# Altium PCB Breakout.PcbDoc
Units mil, origin at the board's own origin, x right, y up, seen from the top; angles counter-clockwise.
Board outline 2900 x 1175 mil, 4 copper layers (Sig/5V, GND 1, GND 2, Sig/3V3), stack 62.445 mil thick; 5 components, 39 nets, 138 pads, 72 vias.
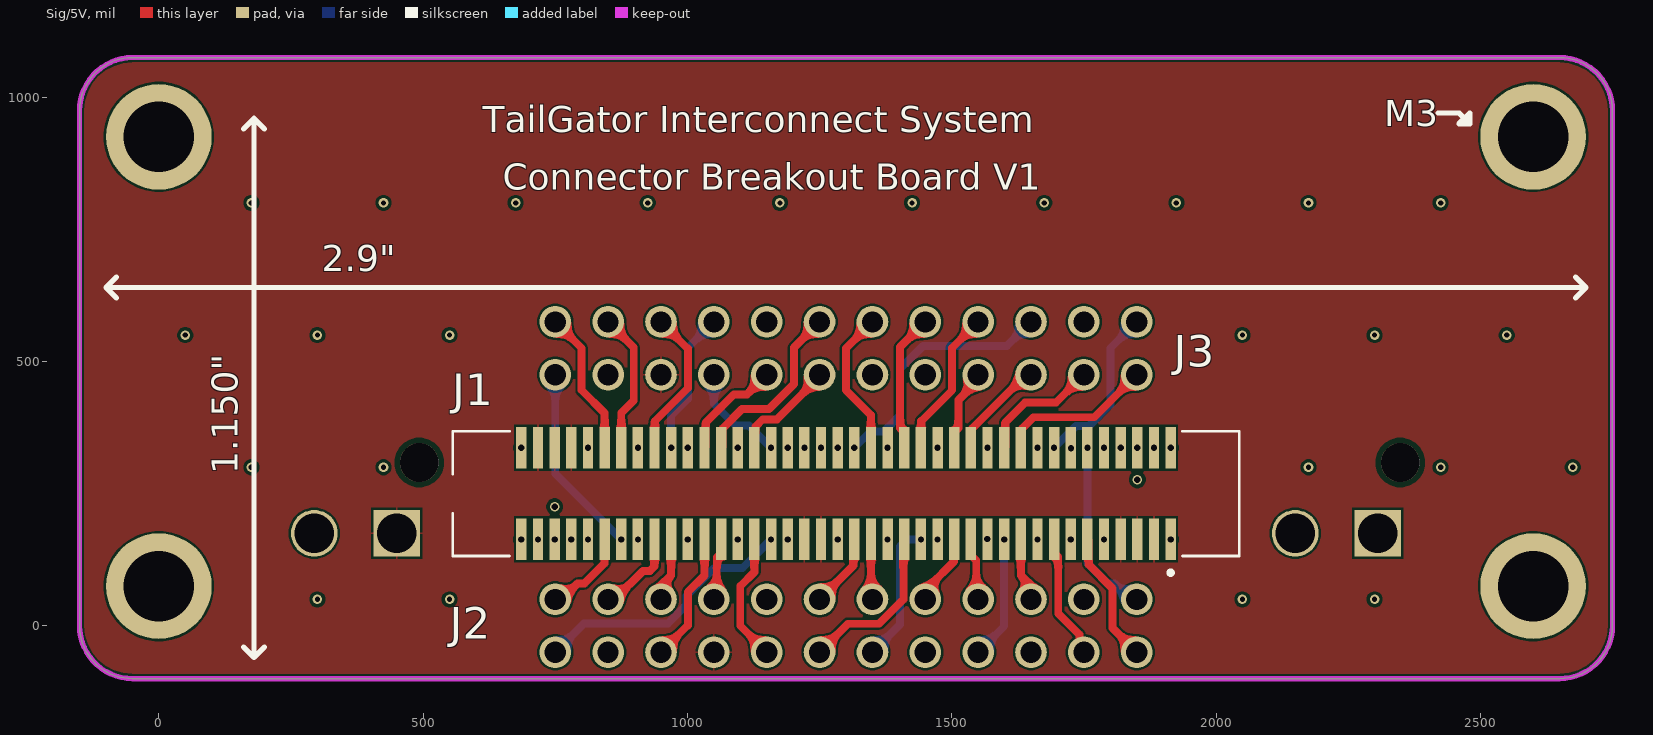
[diagram p0: Sig/5V view]
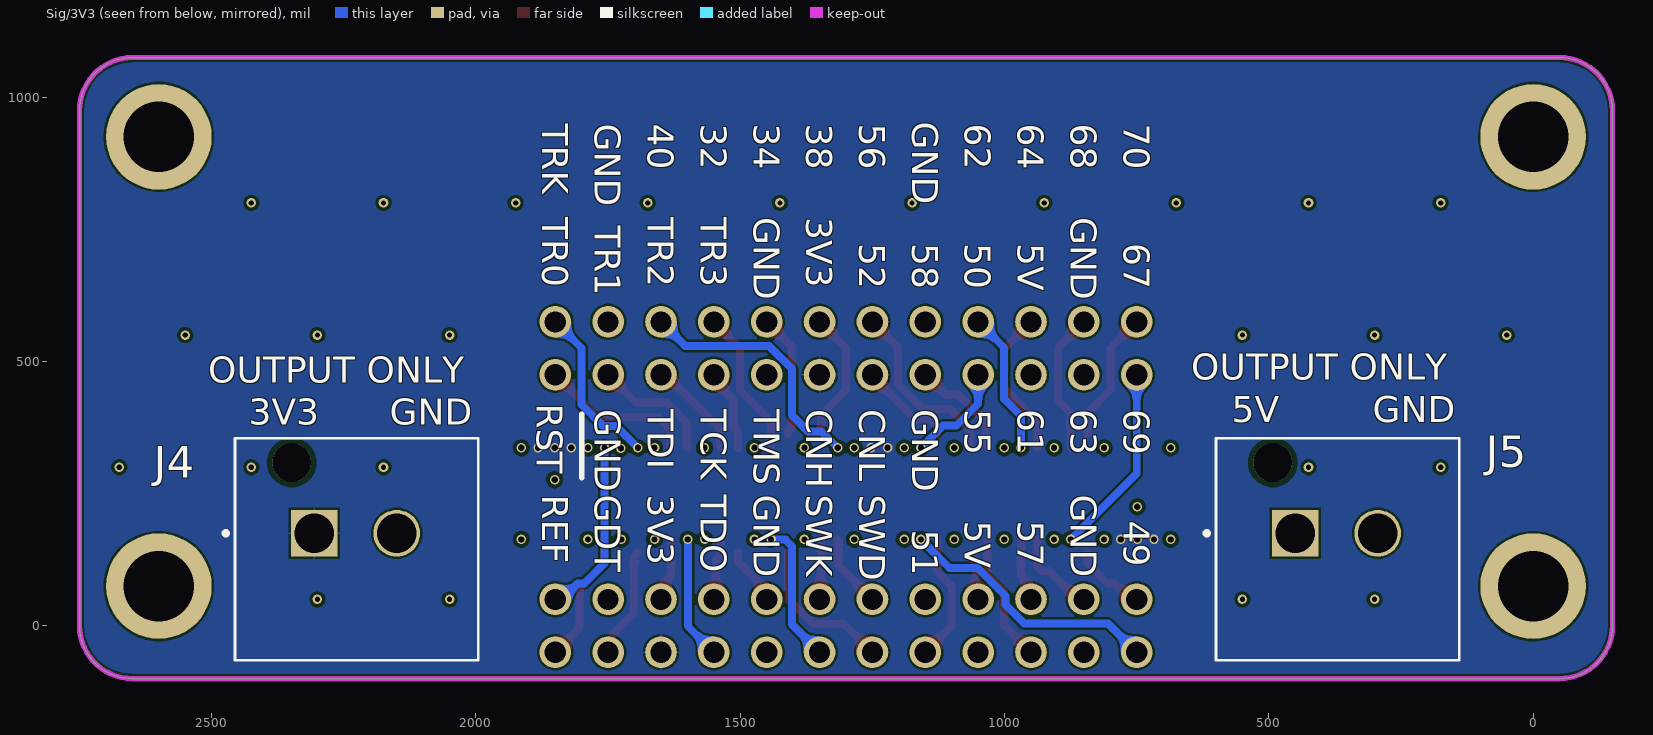
[diagram p1: Sig/3V3 view, seen from below]
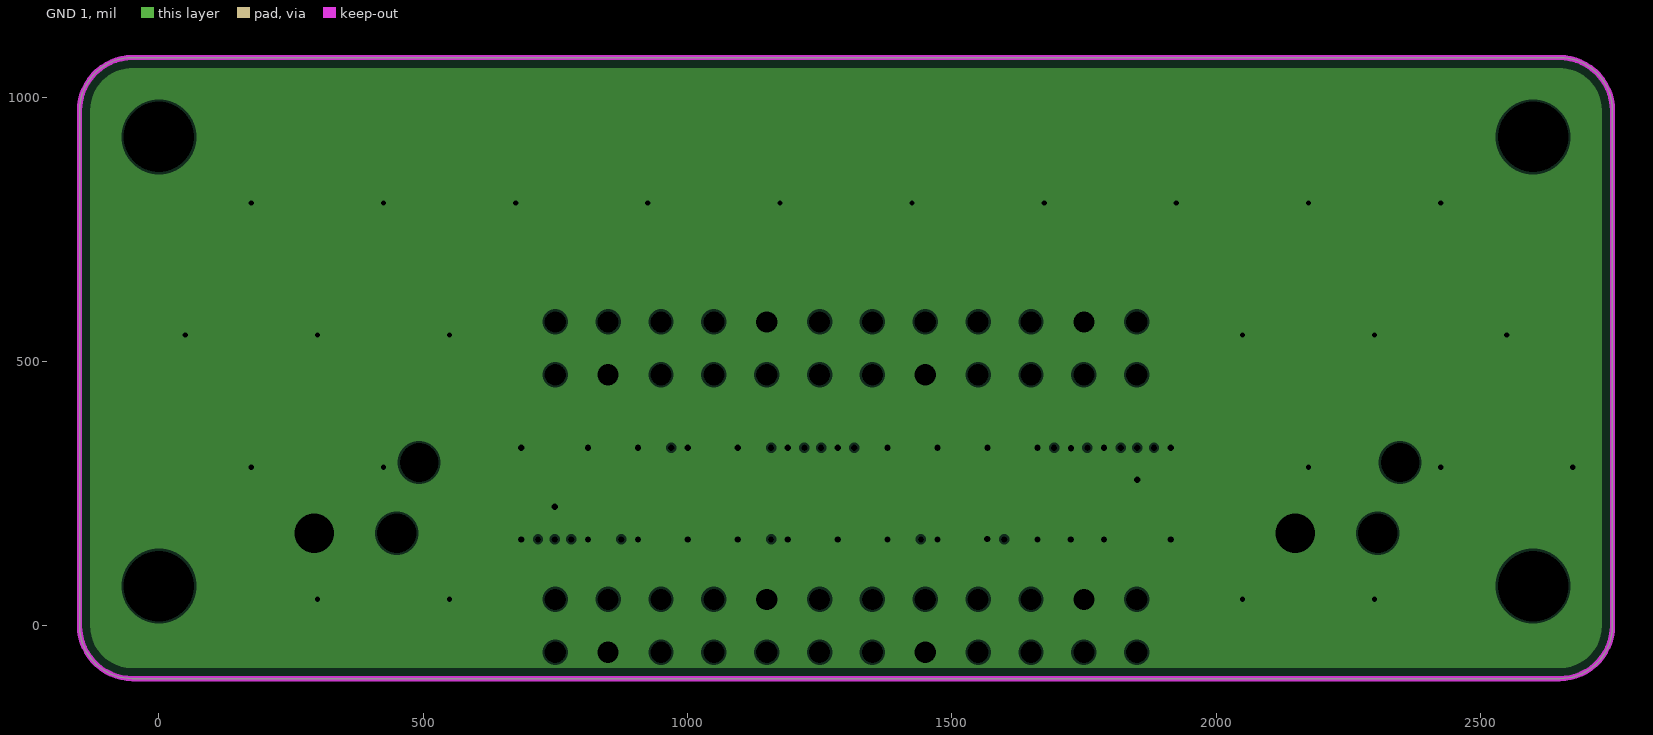
[diagram p2: GND 1, clearances drawn from the general rule]
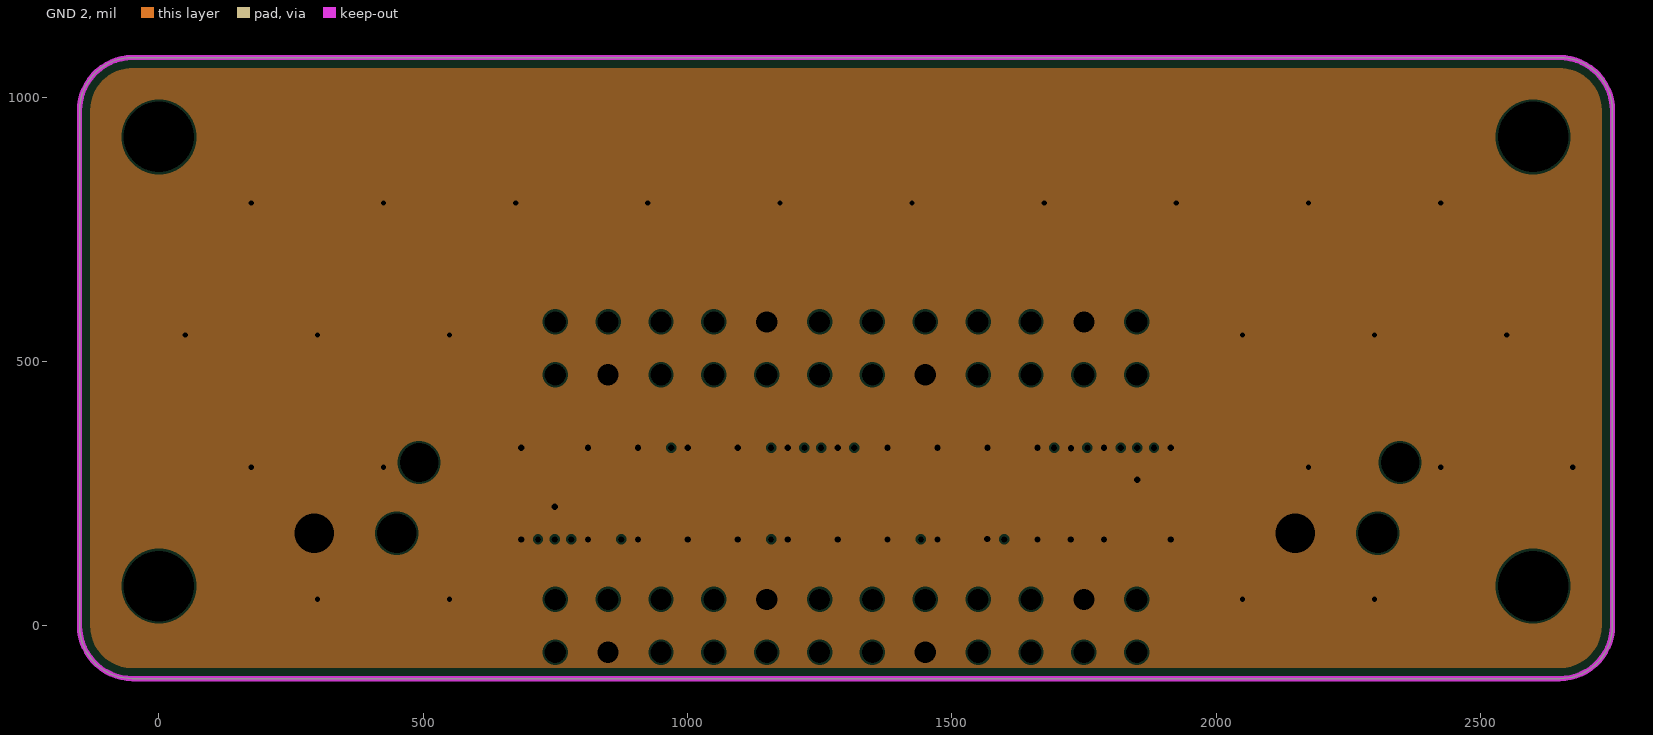
[diagram p3: GND 2, clearances drawn from the general rule]
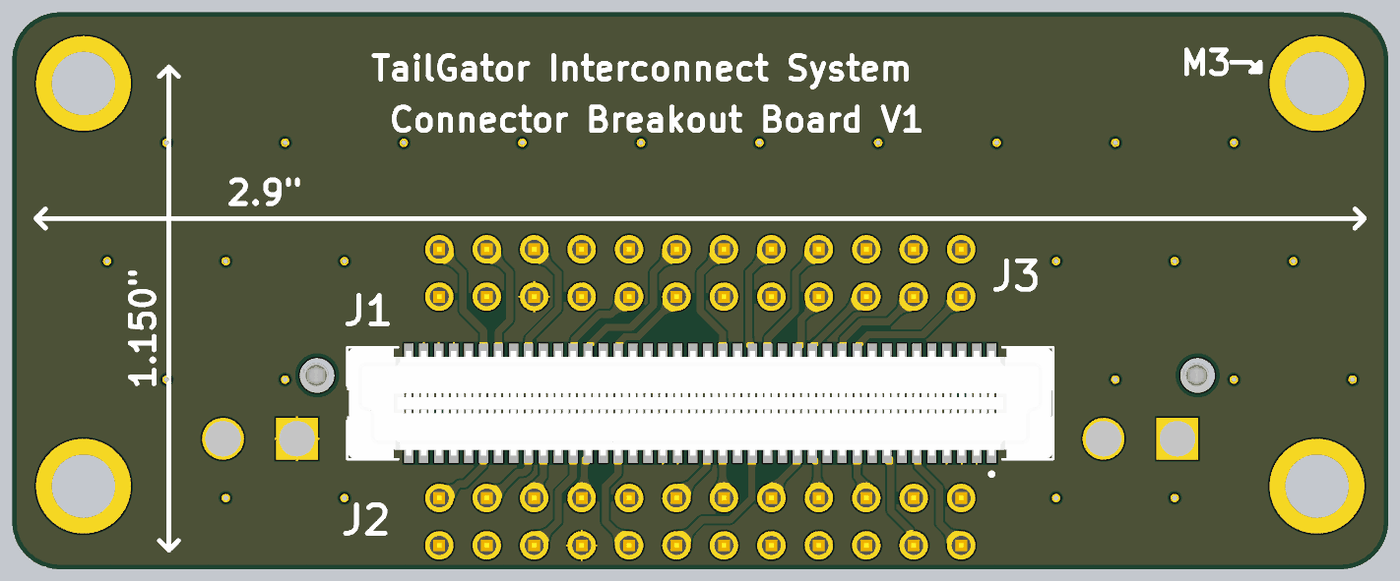
[diagram p4: 3D render of the assembled board from above, using the file's embedded part models]

## Layer stack, top to bottom
Top Mask: solder mask 0.591, Solder Resist, Dk 3.8
Sig/5V: signal copper 1.378
Dielectric 1: prepreg 8.28, 7628, Dk 4.6
GND 1: plane copper 0.6, net GND
Core: core 41.929, FR-4, Dk 4.5
GND 2: plane copper 0.6, net GND
Dielectric 2: prepreg 8.28, 7628, Dk 4.6
Sig/3V3: signal copper 1.378
Bottom Mask: solder mask 0.591, Solder Resist, Dk 3.8

## Board outline
-150,0 -150,975 cw(c-50,975) -50,1075 2650,1075 cw(c2650,975) 2750,975 2750,0 cw(c2650,0) 2650,-100 -50,-100 cw(c-50,0)

## Design rules (kind name [scope] priority, off if disabled: settings)
BoardOutlineClearance [All] p1: gap=7.87 ignorepadtopadclearanceinfootprint=FALSE
Clearance [All] p1: gap=4 ignorepadtopadclearanceinfootprint=FALSE except(5: Arc-Via Track-Via SMDPad-Via THPad-Via Via-Via Via-Fill Via-Poly Via-Region Via-Text; 9.84: Arc-Hole Track-Hole SMDPad-Hole THPad-Hole Via-Hole Fill-Hole Poly-Hole Region-Hole Text-Hole)
ComponentClearance [All] p1: gap=4 collisioncheckmode=3 verticalgap=4 showdistances=TRUE
DiffPairsRouting "Schematic Differential Pairs Routing" [InNetClass('CAN0')] p1: maxlimit=10 minlimit=10 mostfreqgap=10 toplayer_minwidth=15 toplayer_maxwidth=15 toplayer_prefwidth=15 bottomlayer_minwidth=15 bottomlayer_maxwidth=15 bottomlayer_prefwidth=15 maxuncoupledlength=5
DiffPairsRouting [All] p2: maxlimit=4 minlimit=4 mostfreqgap=4 toplayer_minwidth=4 toplayer_maxwidth=71497.94 toplayer_prefwidth=4 bottomlayer_minwidth=4 bottomlayer_maxwidth=71497.94 bottomlayer_prefwidth=4 maxuncoupledlength=500
Height [All] p1: minheight=0 maxheight=71497.94 prefheight=500
HoleSize [All] p1: absolutevalues=TRUE maxlimit=248.03 minlimit=7.87 maxpercent=80.000 minpercent=20.000
HoleToHoleClearance [All] p1: gap=9.84 allowstackedmicrovias=FALSE
MatchedLengths "Schematic Matched Net Lengths" [InNetClass('CAN0')] p1: tolerance=5 checknetsindiffpair=TRUE checkdiffpairvsdiffpair=FALSE checkxsignals=FALSE checkothers=FALSE
MinimumAnnularRing [All] p1: minimumring=3
MinimumSolderMaskSliver [All] p1: minsoldermaskwidth=0
PlaneClearance [All] p1: clearance=4
PlaneConnect PlaneConnectPowerPads [InPadClass('PowerPads')] p1: planeconnectstyle=Direct reliefexpansion=20 reliefentries=4 reliefconductorwidth=10 reliefairgap=10
PlaneConnect [All] p2: pad.planeconnectstyle=Relief pad.reliefexpansion=11.81 pad.reliefentries=4 pad.reliefconductorwidth=4 pad.reliefairgap=4 via.planeconnectstyle=Direct via.reliefexpansion=11.81 via.reliefentries=4 via.reliefconductorwidth=5 via.reliefairgap=5
PolygonConnect PolygonConnectPowerPads [All vs (InPadClass('PowerPads'))] p1: connectstyle=Direct reliefconductorwidth=10 reliefentries=4 polygonreliefangle="90 Angle" airgapwidth=10
PolygonConnect [All] p2: thpad.connectstyle=Relief thpad.reliefconductorwidth=4 thpad.reliefentries=4 thpad.polygonreliefangle="90 Angle" thpad.airgapwidth=4 smdpad.connectstyle=Relief smdpad.reliefconductorwidth=4 smdpad.reliefentries=4 smdpad.polygonreliefangle="90 Angle" smdpad.airgapwidth=4 via.connectstyle=Direct via.reliefconductorwidth=5 via.reliefentries=4 via.polygonreliefangle="90 Angle" via.airgapwidth=5
RoutingVias [All] p1: holewidth=7.87 width=17.72 viastyle="Through Hole" minholewidth=7.87 minwidth=17.72 maxholewidth=248.03 maxwidth=257.87
SilkToSilkClearance [All] p1: silktosilkclearance=0
SilkToSolderMaskClearance [IsPad] p1: minsilkscreentomaskgap=4 clearancetoexposedcopper=TRUE
SolderMaskExpansion [All] p1: expansion=2.95 istentingtop=FALSE
Width [All] p1: maxlimit=71497.94 minlimit=4 preferedwidth=4
20 further rules are at their usual default settings.

## Classes and differential pairs
differential pair class CAN0_LINES: CAN0
net class CAN0: CAN0_N CAN0_P
differential pair CAN0: +CAN0_P -CAN0_N

## Components (designator, comment, footprint, x,y, rotation, side; value= is the part's Value field where it differs from the comment)
J1 "10144518-081802LF" AMPHENOL_10144518-081802LF 1300,250 r180 top locked
J2 "PREC012DAAN-RC" PREC012DAAN-RC 1850,-50 r180 top
J3 "PREC012DAAN-RC" PREC012DAAN-RC 1850,475 r180 top locked
J4 "1877285-2" TE_1877285-2 2305.91,175 r180 bottom
J5 "1877285-2" TE_1877285-2 450,175 r180 bottom

## Footprints (in the part's own frame and the unit in brackets; to place one, negate y for a bottom-side part, rotate by r counter-clockwise, add the part's x,y. Pads: shape width x height; smd on the part's side, far side on the other; paste and mask are expansions set on the pad)
AMPHENOL_10144518-081802LF [mm]
  rect 0.5x2 smd: 1(-15.6,2.2) 2(-15.6,-2.2) 3(-14.8,2.2) 4(-14.8,-2.2) 5(-14,2.2) 6(-14,-2.2) 7(-13.2,2.2) 8(-13.2,-2.2) 9(-12.4,2.2) 10(-12.4,-2.2) 11(-11.6,2.2) 12(-11.6,-2.2) 13(-10.8,2.2) 14(-10.8,-2.2) 15(-10,2.2) 16(-10,-2.2) 17(-9.2,2.2) 18(-9.2,-2.2) 19(-8.4,2.2) 20(-8.4,-2.2) 21(-7.6,2.2) 22(-7.6,-2.2) 23(-6.8,2.2) 24(-6.8,-2.2) 25(-6,2.2) 26(-6,-2.2) 27(-5.2,2.2) 28(-5.2,-2.2) 29(-4.4,2.2) 30(-4.4,-2.2) 31(-3.6,2.2) 32(-3.6,-2.2) 33(-2.8,2.2) 34(-2.8,-2.2) 35(-2,2.2) 36(-2,-2.2) 37(-1.2,2.2) 38(-1.2,-2.2) 39(-0.4,2.2) 40(-0.4,-2.2) 41(0.4,2.2) 42(0.4,-2.2) 43(1.2,2.2) 44(1.2,-2.2) 45(2,2.2) 46(2,-2.2) 47(2.8,2.2) 48(2.8,-2.2) 49(3.6,2.2) 50(3.6,-2.2) 51(4.4,2.2) 52(4.4,-2.2) 53(5.2,2.2) 54(5.2,-2.2) 55(6,2.2) 56(6,-2.2) 57(6.8,2.2) 58(6.8,-2.2) 59(7.6,2.2) 60(7.6,-2.2) 61(8.4,2.2) 62(8.4,-2.2) 63(9.2,2.2) 64(9.2,-2.2) 65(10,2.2) 66(10,-2.2) 67(10.8,2.2) 68(10.8,-2.2) 69(11.6,2.2) 70(11.6,-2.2) 71(12.4,2.2) 72(12.4,-2.2) 73(13.2,2.2) 74(13.2,-2.2) 75(14,2.2) 76(14,-2.2) 77(14.8,2.2) 78(14.8,-2.2) 79(15.6,2.2) 80(15.6,-2.2)
  silkscreen extent -18.9,-3 18.9,3.9, body extent -18.9,-3 18.9,3, height 4.71
PREC012DAAN-RC [mil] "Connector Header Through Hole 24 position 0.100\" (2.54mm)"
  round 60 hole 40: 1(0,-100) 2(100,-100) 3(200,-100) 4(300,-100) 5(400,-100) 6(500,-100) 7(600,-100) 8(700,-100) 9(800,-100) 10(900,-100) 11(1000,-100) 12(1100,-100) 13(0,0) 14(100,0) 15(200,0) 16(300,0) 17(400,0) 18(500,0) 19(600,0) 20(700,0) 21(800,0) 22(900,0) 23(1000,0) 24(1100,0)
  body extent -50,-150 1150,50, height 96
TE_1877285-2 [mm]
  rect 2.24x2.24 hole 1.89: 1(0,0)
  round 2.24 hole 1.89: 2(3.96,0)
  round 1.86 hole 1.86 unplated: ""(-1.08,3.4)
  silkscreen extent -4.36,-6.1 7.87,4.57, body extent -3.55,-5.82 7.62,4.06, height 12.01

## Part data
J1: "CONN PLUG 1 80POS SMD GOLD", Supplier Part Number 1=609-5453-1-ND, Supplier 1=Digikey, System=Connector
J2 J3: "Connector Header Through Hole 24 position 0.100\" (2.54mm)", Supplier Part Number 1=S2012EC-12-ND, Supplier 1=Digikey
J4 J5: Supplier Part Number 1=A99845-ND, Supplier 1=Digi-Key

## Free pads (board coordinates)
  round 200 hole 133.86: M3(0,75) M3(0,925) M3(2600,75) M3(2600,925)

## Via types
v1: diameter 17.81, hole 11.81, Sig/5V to Sig/3V3, tented top, 47 vias
v2: diameter 18, hole 10, Sig/5V to Sig/3V3, 25 vias

## Nets (pads, with @x,y where several pads share a name; then routed paths per layer and width w, separated by ;. In a path a pad name is that pad's centre, name@x,y a point inside that pad or via, vN(x,y) a via of type N, cw(c..) or ccw(c..) an arc to the next point about the centre after c; other vN are vias at no path point)
+3V3: J1.4 J1.6 J1.8 J1.44 J1.46 J1.73 J1.75 J1.77 J2.15 J3.18 J4.1
  other v1: 717.32,163.39 748.82,163.39 780.32,163.39 1221.26,336.61 1252.76,336.61 1819.69,336.61 1851.18,336.61 1882.68,336.61
+5V: J1.3 J1.5 J1.7 J1.43 J1.45 J1.74 J1.76 J1.78 J2.21 J3.22 J5.1
CAN0_N: J1.39 J2.7 | length 140.5
  Sig/5V w15: J2.7@1250,50.07 1314.01,114.09 1314.01,161.65 J1.39
CAN0_P: J1.37 J2.6 | length 114.5
  Sig/5V w15: J1.37 1347.24,52.76 J2.6
GND: J1.1 J1.2 J1.9 J1.10 J1.13 J1.14 J1.17 J1.18 J1.23 J1.24 J1.29 J1.30 J1.35 J1.36 J1.41 J1.42 J1.47 J1.48 J1.53 J1.54 J1.59 J1.60 J1.65 J1.66 J1.71 J1.72 J1.79 J1.80 J2.2 J2.8 J2.17 J2.23 J3.2 J3.8 J3.17 J3.23 J4.2 J5.2
  other v1: 685.83,163.39 811.81,163.39 906.3,163.39 1000.79,163.39 1095.28,163.39 1189.76,163.39 1284.25,163.39 1378.74,163.39 1473.23,163.39 1662.2,163.39 1725.2,163.39 1788.19,163.39 1914.17,163.39 1567.03,164.08 748.82,225.2 1851.18,276.38 1725.89,335.92 685.83,336.61 811.81,336.61 906.3,336.61 1000.79,336.61 1095.28,336.61 1189.76,336.61 1284.25,336.61 1378.74,336.61 1473.23,336.61 1567.72,336.61 1662.2,336.61 1788.19,336.61 1914.17,336.61
  other v2: 300,50 550,50 2050,50 2300,50 175,300 425,300 2175,300 2425,300 2675,300 50,550 300,550 550,550 2050,550 2300,550 2550,550 175,800 425,800 675,800 925,800 1175,800 1425,800 1675,800 1925,800 2175,800 2425,800
GNDDetect: J1.15 J2.14 | length 211.9
  Sig/5V w15: J1.15@1693.7,138.58 1693.7,137.85 1701.57,129.97 1701.57,23.43 1741.39,-16.39 1741.39,-41.39 J2.14
JnRST: J1.12 J2.1 | length 339.9
  Sig/3V3 w15: v1(1756.69,336.61) 1756.69,118.31 1795.07,79.93 1807.9,79.93 1837.82,50 J2.1
JTCK: J1.25 J2.4 | length 119.1
  Sig/5V w15: J1.25 1536.22,133.86 1546.37,123.7 1546.37,53.63 J2.4
JTDI: J1.19 J2.3 | length 121.4
  Sig/5V w15: J1.19 1630.71,95.16 1648.37,77.5 1648.37,51.63 J2.3
JTDO: J1.21 J2.16 | length 233.8
  Sig/3V3 w15: J2.16 1599.21,-0.79 v1(1599.21,163.39)
JTMS: J1.27 J2.5 | length 111.3
  Sig/5V w15: J2.5 1458.61,58.61 1458.61,75.79 1504.2,121.38 1504.2,138.06 J1.27@1504.72,138.58
RSVD_32: J1.32 J3.4 | length 283.2
  Sig/5V w15: J1.32 1442.25,337.13 1442.25,387.13 1500.79,445.67 1500.79,525.79 J3.4
RSVD_34: J1.34 J3.5 | length 235
  Sig/5V w15: J1.34@1410.24,362.99 1410.24,366.14 1402.36,374.02 1402.36,527.36 J3.5
RSVD_38: J1.38 J3.6 | length 252.3
  Sig/5V w15: J1.38@1347.24,362.99 1347.24,398.43 1300,445.67 1300,525 J3.6
RSVD_40: J1.40 J3.3 | length 484.3
  Sig/3V3 w15: v1(1315.75,336.61) 1346.92,367.79 1371.73,367.79 1402.36,398.43 1402.36,486.05 1445.6,529.29 1604.29,529.29 J3.3
RSVD_49: J1.49 J2.24 | length 506.8
  Sig/3V3 w15: J2.24 804.21,4.21 962.9,4.21 997.86,39.17 997.86,56.55 1051.01,109.7 1104.58,109.7 v1(1158.27,163.39)
RSVD_50: J1.50 J3.21 | length 197.8
  Sig/3V3 w15: J3.21 1050,420.08 1091.46,378.62 1116.27,378.62 v1(1158.27,336.61)
RSVD_51: J1.51 J2.20 | length 245.2
  Sig/5V w15: J1.51 1126.77,101.77 1100,75 1100,0 J2.20
RSVD_52: J1.52 J3.19 | length 178.8
  Sig/5V w15: J1.52@1126.77,362.99 1129.11,365.33 1129.11,377.15 1142.52,390.55 1169.39,390.55 1250,471.16 J3.19
RSVD_55: J1.55 J2.9 | length 94.3
  Sig/5V w15: J2.9 1055.53,55.53 1055.53,129.6 1063.78,137.85 J1.55@1063.78,138.58
RSVD_56: J1.56 J3.7 | length 345.3
  Sig/5V w15: J1.56 1066.12,338.96 1066.12,372.94 1103.42,410.24 1154.33,410.24 1201.57,457.48 1201.57,526.57 J3.7
RSVD_57: J1.57 J2.22 | length 247.5
  Sig/5V w15: J2.22 1000.79,0.79 1000.79,63.78 1032.28,95.28 J1.57
RSVD_58: J1.58 J3.20 | length 201.6
  Sig/5V w15: J1.58 1034.63,338.96 1034.63,384.35 1088.15,437.88 1112.88,437.88 J3.20
RSVD_61: J1.61 J2.10 | length 121.4
  Sig/5V w15: J2.10 951.63,51.63 951.63,77.5 969.29,95.16 J1.61
RSVD_62: J1.62 J3.9 | length 271.8
  Sig/3V3 w15: v1(969.29,336.61) 969.29,397.33 1000.79,428.83 1000.79,525.79 J3.9
RSVD_63: J1.63 J2.11 | length 164.4
  Sig/5V w15: J2.11 862.18,50 915.96,103.79 928.79,103.79 937.57,112.57 937.57,163.16 J1.63
RSVD_64: J1.64 J3.10 | length 285.5
  Sig/5V w15: J1.64 938.31,337.13 938.31,387.13 1000.79,449.61 1000.79,524.21 J3.10
RSVD_67: J1.67 J3.24 | length 363.3
  Sig/3V3 w15: J3.24 750,288.19 v1(874.8,163.39)
RSVD_68: J1.68 J3.11 | length 268.2
  Sig/5V w15: J3.11 898.43,526.57 898.43,425.98 874.8,402.36 J1.68
RSVD_69: J1.69 J2.12 | length 141.9
  Sig/5V w15: J2.12 762.18,50 792.1,79.93 804.93,79.93 842.79,117.79 842.79,138.06 J1.69@843.31,138.58
RSVD_70: J1.70 J3.12 | length 250.7
  Sig/5V w15: J3.12 800,525 800,445.67 843.31,402.36 J1.70@843.31,362.99
SWDCLK: J1.31 J2.18 | length 266.8
  Sig/3V3 w15: J2.18 1402.36,2.36 1402.36,150.39 1414.82,162.85 1441.19,162.85 v1(1441.73,163.39)
SWDIO: J1.33 J2.19 | length 289.3
  Sig/5V w15: J2.19 1303.91,3.91 1362.6,3.91 1408.5,49.81 1408.5,136.89 J1.33@1410.21,138.6
TRACECLK: J1.16 J3.1 | length 317.7
  Sig/3V3 w15: v1(1693.7,336.61) 1734.91,377.82 1759.71,377.82 1800,418.11 1800,525 J3.1
TRD0: J1.20 J3.13 | length 296.5
  Sig/5V w15: J1.20 1633.05,338.96 1633.05,372.94 1654.6,394.49 1769.49,394.49 J3.13
TRD1: J1.22 J3.14 | length 235.1
  Sig/5V w15: J1.22 1601.56,338.96 1601.56,385.02 1638.58,422.05 1697.05,422.05 J3.14
TRD2: J1.26 J3.15 | length 191
  Sig/5V w15: J1.26 1538.56,338.96 1538.56,372.94 1640.63,475 J3.15
TRD3: J1.28 J3.16 | length 157.1
  Sig/5V w15: J1.28 1504.72,366.14 1512.78,374.2 1512.78,427.37 1550,464.58 J3.16
VREF: J1.11 J2.13 | length 252
  Sig/5V w15: J1.11 1759.04,161.04 1759.04,115.96 1804.29,70.71 1804.29,-4.29 J2.13
pads on no net: J4. J5.

## Polygon pours and split planes (outlines as drawn)
+3V3 on Sig/3V3 "+3V3_L04_P001" (solid, remove dead copper, pour order 1): -150,0 -150,975 cw(c-50,975) -50,1075 2650,1075 cw(c2650,975) 2750,975 2750,0 cw(c2650,0) 2650,-100 -50,-100 cw(c-50,0)
+5V on Sig/5V "+5V_L01_P000" (solid, remove dead copper, pour order 0): -150,0 -150,975 cw(c-50,975) -50,1075 2650,1075 cw(c2650,975) 2750,975 2750,0 cw(c2650,0) 2650,-100 -50,-100 cw(c-50,0)
GND on GND 2 (split plane): 2657.84,1054.61 2665.61,1053.46 2673.22,1051.55 2680.61,1048.91 2687.71,1045.55 2694.44,1041.51 2700.75,1036.84 2706.57,1031.57 2711.84,1025.75 2716.51,1019.44 2720.55,1012.71 2723.91,1005.61 2726.55,998.22 2728.46,990.61 2729.61,982.84 2729.97,975.63 2729.9,975 2729.9,0 2729.97,-0.63 2729.61,-7.84 2728.46,-15.61 2726.55,-23.22 2723.91,-30.61 2720.55,-37.71 2716.51,-44.44 2711.84,-50.75 2706.57,-56.57 2700.75,-61.84 2694.44,-66.51 2687.71,-70.55 2680.61,-73.91 2673.22,-76.55 2665.61,-78.46 2657.84,-79.61 2650.63,-79.97 2650,-79.9 -50,-79.9 -50.63,-79.97 -57.84,-79.61 -65.61,-78.46 -73.22,-76.55 -80.61,-73.91 -87.71,-70.55 -94.44,-66.51 -100.75,-61.84 -106.57,-56.57 -111.84,-50.75 -116.51,-44.44 -120.55,-37.71 -123.91,-30.61 -126.55,-23.22 -128.46,-15.61 -129.61,-7.84 -129.97,-0.63 -129.9,0 -129.9,975 -129.97,975.63 -129.61,982.84 -128.46,990.61 -126.55,998.22 -123.91,1005.61 -120.55,1012.71 -116.51,1019.44 -111.84,1025.75 -106.57,1031.57 -100.75,1036.84 -94.44,1041.51 -87.71,1045.55 -80.61,1048.91 -73.22,1051.55 -65.61,1053.46 -57.84,1054.61 -50.63,1054.97 -50,1054.9 2650,1054.9 2650.63,1054.97
GND on GND 1 (split plane): 2657.84,1054.61 2665.61,1053.46 2673.22,1051.55 2680.61,1048.91 2687.71,1045.55 2694.44,1041.51 2700.75,1036.84 2706.57,1031.57 2711.84,1025.75 2716.51,1019.44 2720.55,1012.71 2723.91,1005.61 2726.55,998.22 2728.46,990.61 2729.61,982.84 2729.97,975.63 2729.9,975 2729.9,0 2729.97,-0.63 2729.61,-7.84 2728.46,-15.61 2726.55,-23.22 2723.91,-30.61 2720.55,-37.71 2716.51,-44.44 2711.84,-50.75 2706.57,-56.57 2700.75,-61.84 2694.44,-66.51 2687.71,-70.55 2680.61,-73.91 2673.22,-76.55 2665.61,-78.46 2657.84,-79.61 2650.63,-79.97 2650,-79.9 -50,-79.9 -50.63,-79.97 -57.84,-79.61 -65.61,-78.46 -73.22,-76.55 -80.61,-73.91 -87.71,-70.55 -94.44,-66.51 -100.75,-61.84 -106.57,-56.57 -111.84,-50.75 -116.51,-44.44 -120.55,-37.71 -123.91,-30.61 -126.55,-23.22 -128.46,-15.61 -129.61,-7.84 -129.97,-0.63 -129.9,0 -129.9,975 -129.97,975.63 -129.61,982.84 -128.46,990.61 -126.55,998.22 -123.91,1005.61 -120.55,1012.71 -116.51,1019.44 -111.84,1025.75 -106.57,1031.57 -100.75,1036.84 -94.44,1041.51 -87.71,1045.55 -80.61,1048.91 -73.22,1051.55 -65.61,1053.46 -57.84,1054.61 -50.63,1054.97 -50,1054.9 2650,1054.9 2650.63,1054.97

## Keep-outs
Keep-Out Layer:
  the board outline again, w10

## Silkscreen, mask and mechanical layers (free items; w line width, h text height)
Top Overlay:
  lines w10: -80,620 -100,640 ; -80,660 -100,640 ; 160,-40 180,-60 ; 160,940 180,960 ; 200,-40 180,-60 ; 200,940 180,960 ; 2420,970 2460,970 2480,950 ; 2680,620 2700,640 ; 2680,660 2700,640 ; -100,640 2700,640 ; 180,-60 180,960 ; 2480,950 2460,950 2480,970 2480,950
  text "M3" at 2318.35,945.01 h50
  text "TailGator Interconnect System" at 612.72,933.34 h50
  text "Connector Breakout Board V1" at 650.21,825.01 h50
  text "2.9\"" at 308.36,670.84 h50
  text "1.150\"" at 149.16,286.71 h50 r90
Bottom Overlay:
  lines w10: 1800,280 1800,400
  text "GND" at 1174.99,953.29 h50 r90
  text "70" at 774.99,950 h50 r90
  text "68" at 874.99,950 h50 r90
  text "64" at 974.99,950 h50 r90
  text "62" at 1074.99,950 h50 r90
  text "56" at 1274.99,950 h50 r90
  text "38" at 1374.99,950 h50 r90
  text "34" at 1474.99,950 h50 r90
  text "32" at 1574.99,950 h50 r90
  text "40" at 1674.99,950 h50 r90
  text "GND" at 1774.99,950 h50 r90
  text "TRK" at 1874.99,950 h50 r90
  text "GND" at 874.99,773.29 h50 r90
  text "3V3" at 1374.99,773.29 h50 r90
  text "GND" at 1474.99,773.29 h50 r90
  text "TR3" at 1574.99,773.29 h50 r90
  text "TR2" at 1674.99,773.29 h50 r90
  text "TR0" at 1874.99,773.29 h50 r90
  text "TR1" at 1774.99,756.63 h50 r90
  text "67" at 774.99,723.31 h50 r90
  text "5V" at 974.99,723.31 h50 r90
  text "50" at 1074.99,723.31 h50 r90
  text "58" at 1174.99,723.31 h50 r90
  text "52" at 1274.99,723.31 h50 r90
  text "OUTPUT ONLY" at 646.58,465.01 h50
  text "OUTPUT ONLY" at 2506.58,460.01 h50
  text "RST" at 1884.99,420 h50 r90
  text "69" at 774.99,410 h50 r90
  text "63" at 874.99,410 h50 r90
  text "61" at 974.99,410 h50 r90
  text "55" at 1074.99,410 h50 r90
  text "GND" at 1174.99,410 h50 r90
  text "CNL" at 1274.99,410 h50 r90
  text "CNH" at 1374.99,410 h50 r90
  text "TMS" at 1474.99,410 h50 r90
  text "TCK" at 1574.99,410 h50 r90
  text "TDI" at 1674.99,410 h50 r90
  text "GND" at 1774.99,410 h50 r90
  text "GND" at 303.29,385.01 h50
  text "5V" at 570,385.01 h50
  text "GND" at 2163.29,380.01 h50
  text "3V3" at 2430,380.01 h50
  text "GND" at 874.99,248.29 h50 r90
  text "SWD" at 1274.99,248.29 h50 r90
  text "SWK" at 1374.99,248.29 h50 r90
  text "GND" at 1474.99,248.29 h50 r90
  text "TDO" at 1574.99,248.29 h50 r90
  text "3V3" at 1674.99,248.29 h50 r90
  text "GDT" at 1774.99,248.29 h50 r90
  text "REF" at 1874.99,248.29 h50 r90
  text "49" at 774.99,198.31 h50 r90
  text "57" at 974.99,198.31 h50 r90
  text "5V" at 1074.99,198.31 h50 r90
  text "51" at 1174.99,181.65 h50 r90
Mechanical 1:
  lines w10: -150,600 2750,600 ; 550,250 2050,250 ; 1300,-100 1300,1075

## Text inside footprints (layer, text, board x,y; h text height)
J2: Mechanical 1 "24" at 730.01,199.64 h40 r270; Mechanical 1 "23" at 830,199.64 h40 r270; Mechanical 1 "22" at 930,199.64 h40 r270; Mechanical 1 "21" at 1030,186.31 h40 r270; Mechanical 1 "20" at 1130,199.64 h40 r270; Mechanical 1 "19" at 1230,192.98 h40 r270; Mechanical 1 "18" at 1330,192.98 h40 r270; Mechanical 1 "17" at 1430,192.98 h40 r270; Mechanical 1 "16" at 1530,192.98 h40 r270; Mechanical 1 "15" at 1630,192.98 h40 r270; Mechanical 1 "12" at 730,317.98 h40 r270; Mechanical 1 "11" at 830,304.65 h40 r270; Mechanical 1 "10" at 930,317.98 h40 r270; Mechanical 1 "9" at 1030,284.65 h40 r270; Mechanical 1 "8" at 1130,284.65 h40 r270; Mechanical 1 "7" at 1230,284.65 h40 r270; Mechanical 1 "6" at 1330,284.65 h40 r270; Mechanical 1 "5" at 1430,284.65 h40 r270; Mechanical 1 "4" at 1530,284.65 h40 r270; Mechanical 1 "3" at 1630,284.65 h40 r270; Mechanical 1 "2" at 1730,284.65 h40 r270; Mechanical 1 "1" at 1830,271.33 h40 r270; Mechanical 1 "14" at 1730,192.98 h40 r270; Mechanical 1 "13" at 1830,192.98 h40 r270
J3: Mechanical 1 "24" at 730.01,724.64 h40 r270; Mechanical 1 "23" at 830,724.64 h40 r270; Mechanical 1 "22" at 930,724.64 h40 r270; Mechanical 1 "21" at 1030,711.31 h40 r270; Mechanical 1 "20" at 1130,724.64 h40 r270; Mechanical 1 "19" at 1230,717.98 h40 r270; Mechanical 1 "18" at 1330,717.98 h40 r270; Mechanical 1 "17" at 1430,717.98 h40 r270; Mechanical 1 "16" at 1530,717.98 h40 r270; Mechanical 1 "15" at 1630,717.98 h40 r270; Mechanical 1 "12" at 730,842.98 h40 r270; Mechanical 1 "11" at 830,829.65 h40 r270; Mechanical 1 "10" at 930,842.98 h40 r270; Mechanical 1 "9" at 1030,809.65 h40 r270; Mechanical 1 "8" at 1130,809.65 h40 r270; Mechanical 1 "7" at 1230,809.65 h40 r270; Mechanical 1 "6" at 1330,809.65 h40 r270; Mechanical 1 "5" at 1430,809.65 h40 r270; Mechanical 1 "4" at 1530,809.65 h40 r270; Mechanical 1 "3" at 1630,809.65 h40 r270; Mechanical 1 "2" at 1730,809.65 h40 r270; Mechanical 1 "1" at 1830,796.33 h40 r270; Mechanical 1 "14" at 1730,717.98 h40 r270; Mechanical 1 "13" at 1830,717.98 h40 r270